# Altium PCB PCB1.PcbDoc (part 1 of 2)
Units mm, origin at the board's own origin, x right, y up, seen from the top; angles counter-clockwise.
Board outline 100.46 x 63.37 mm, 4 copper layers (Top Layer, GND, VCC, Btm lyer), stack 0.603 mm thick; 189 components, 141 nets, 719 pads, 18 vias.
Unrouted connection lines stored in the file: 486.
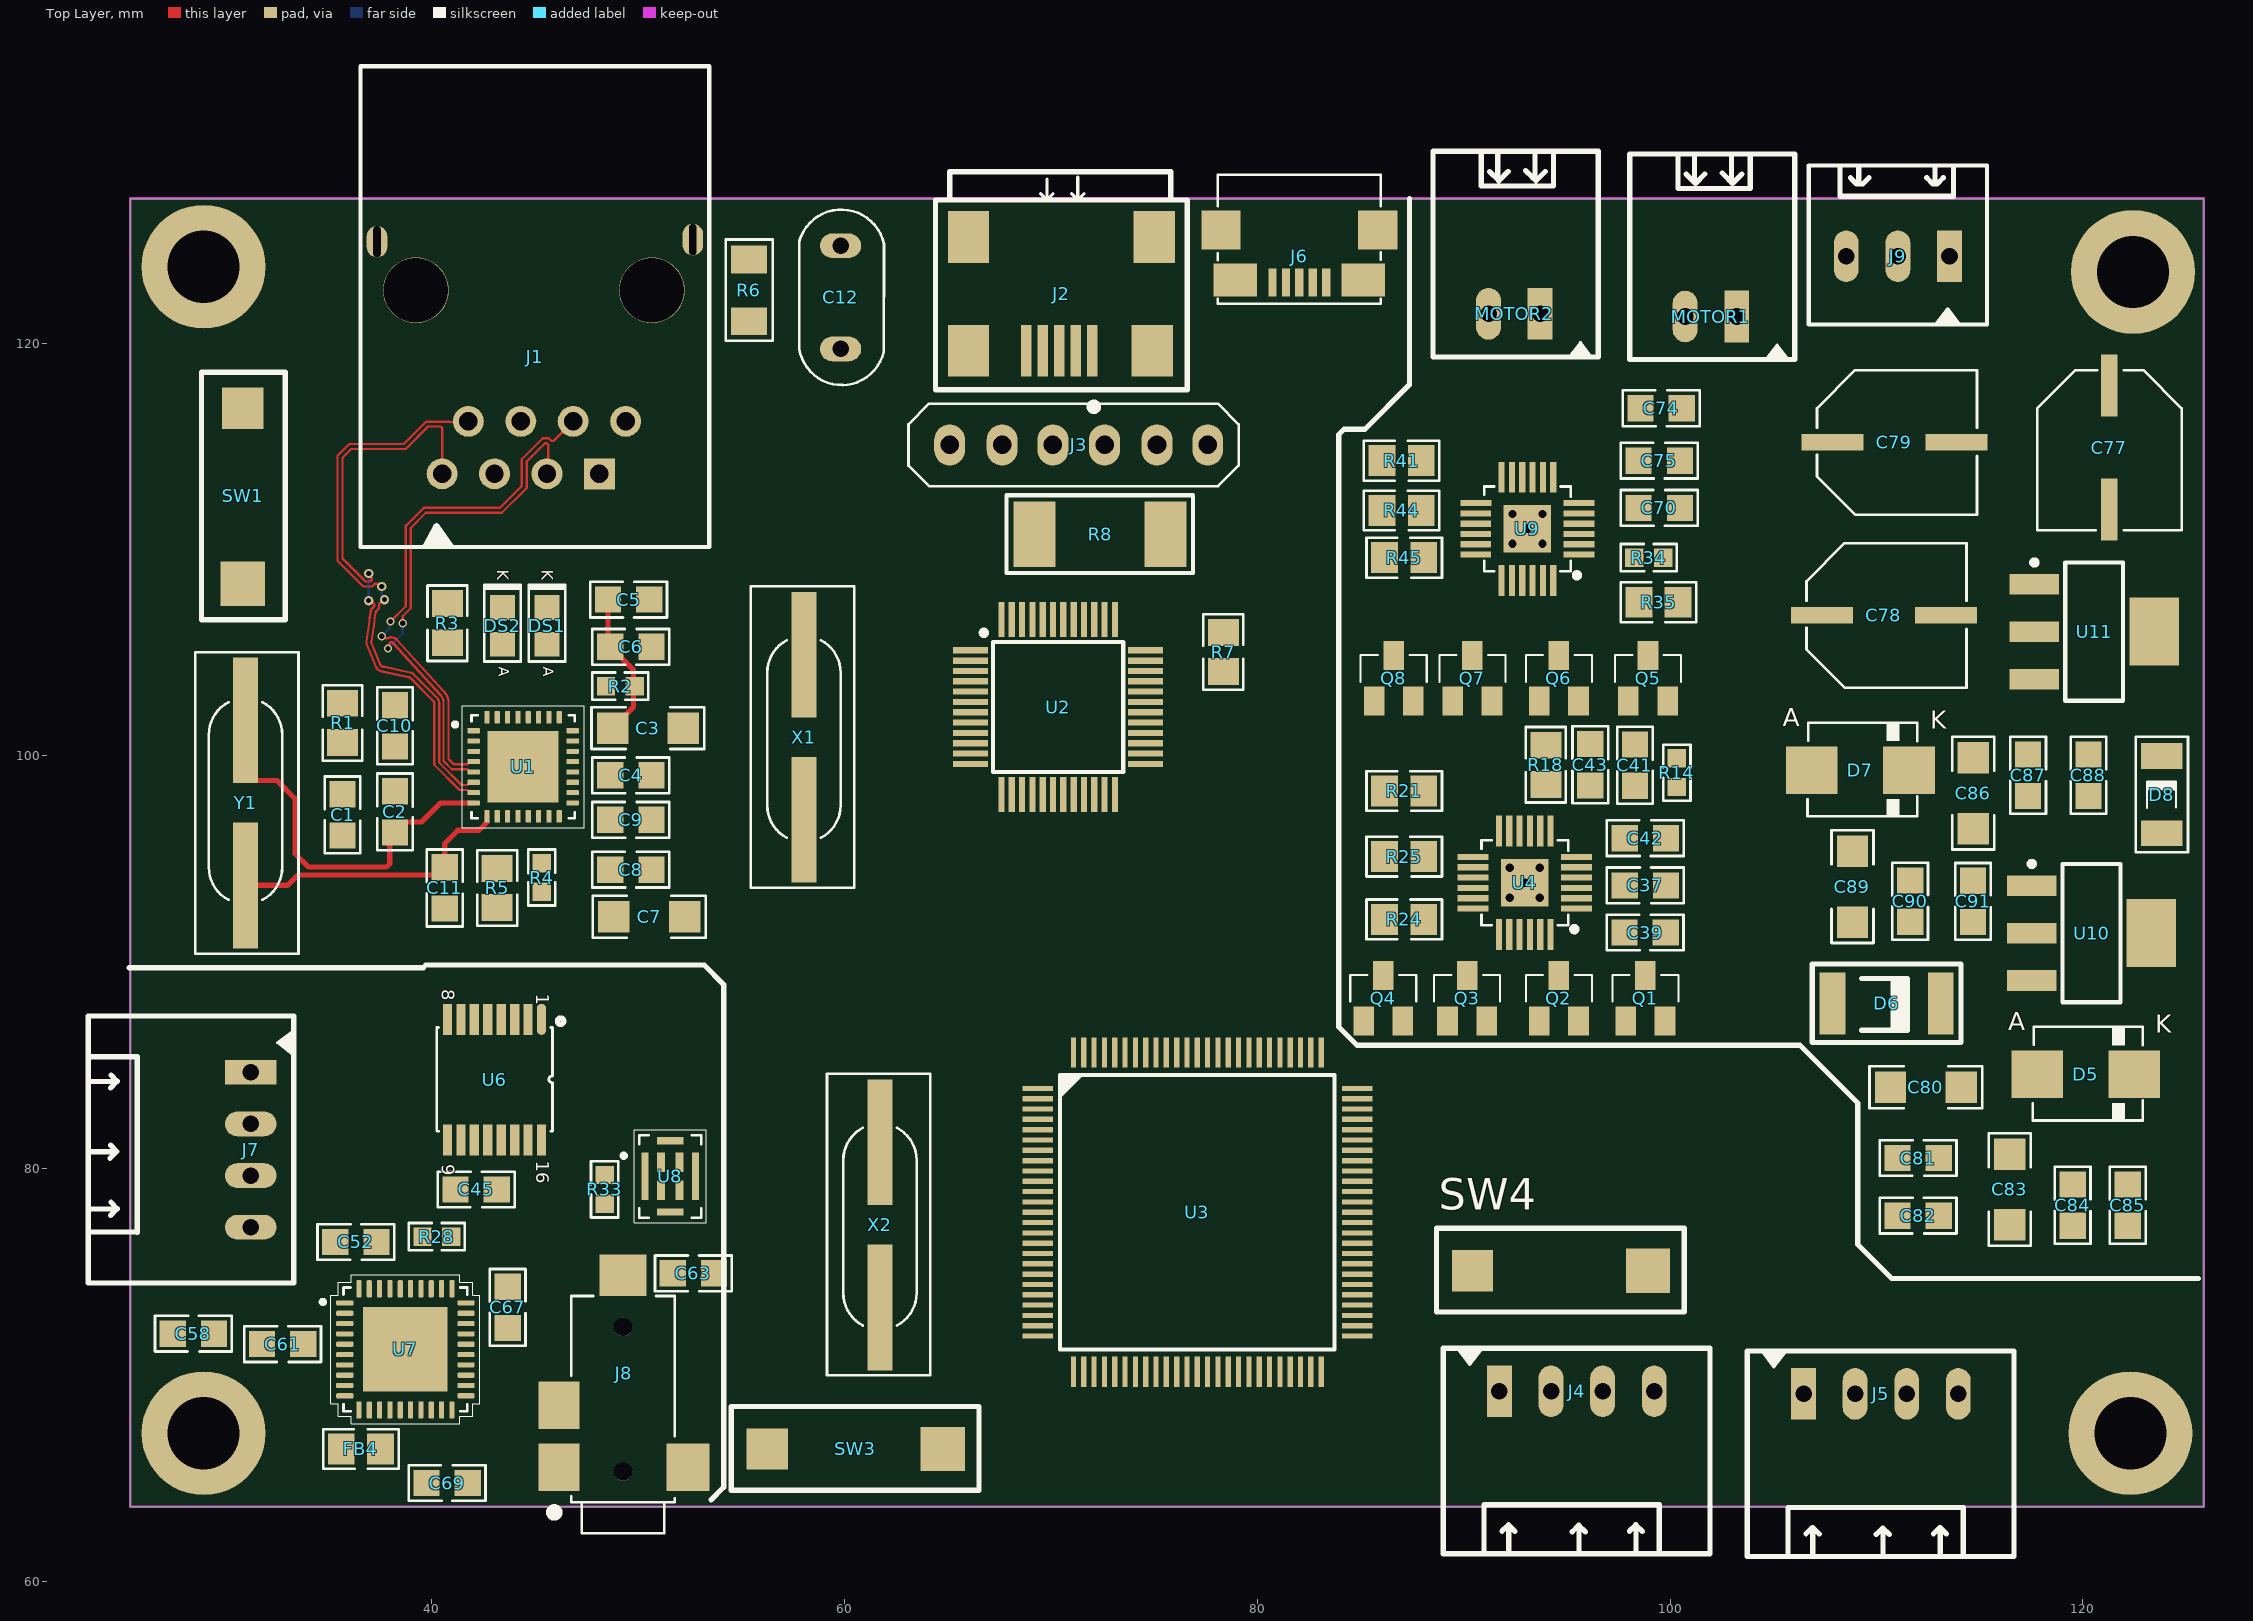
[diagram p0: Top Layer view]
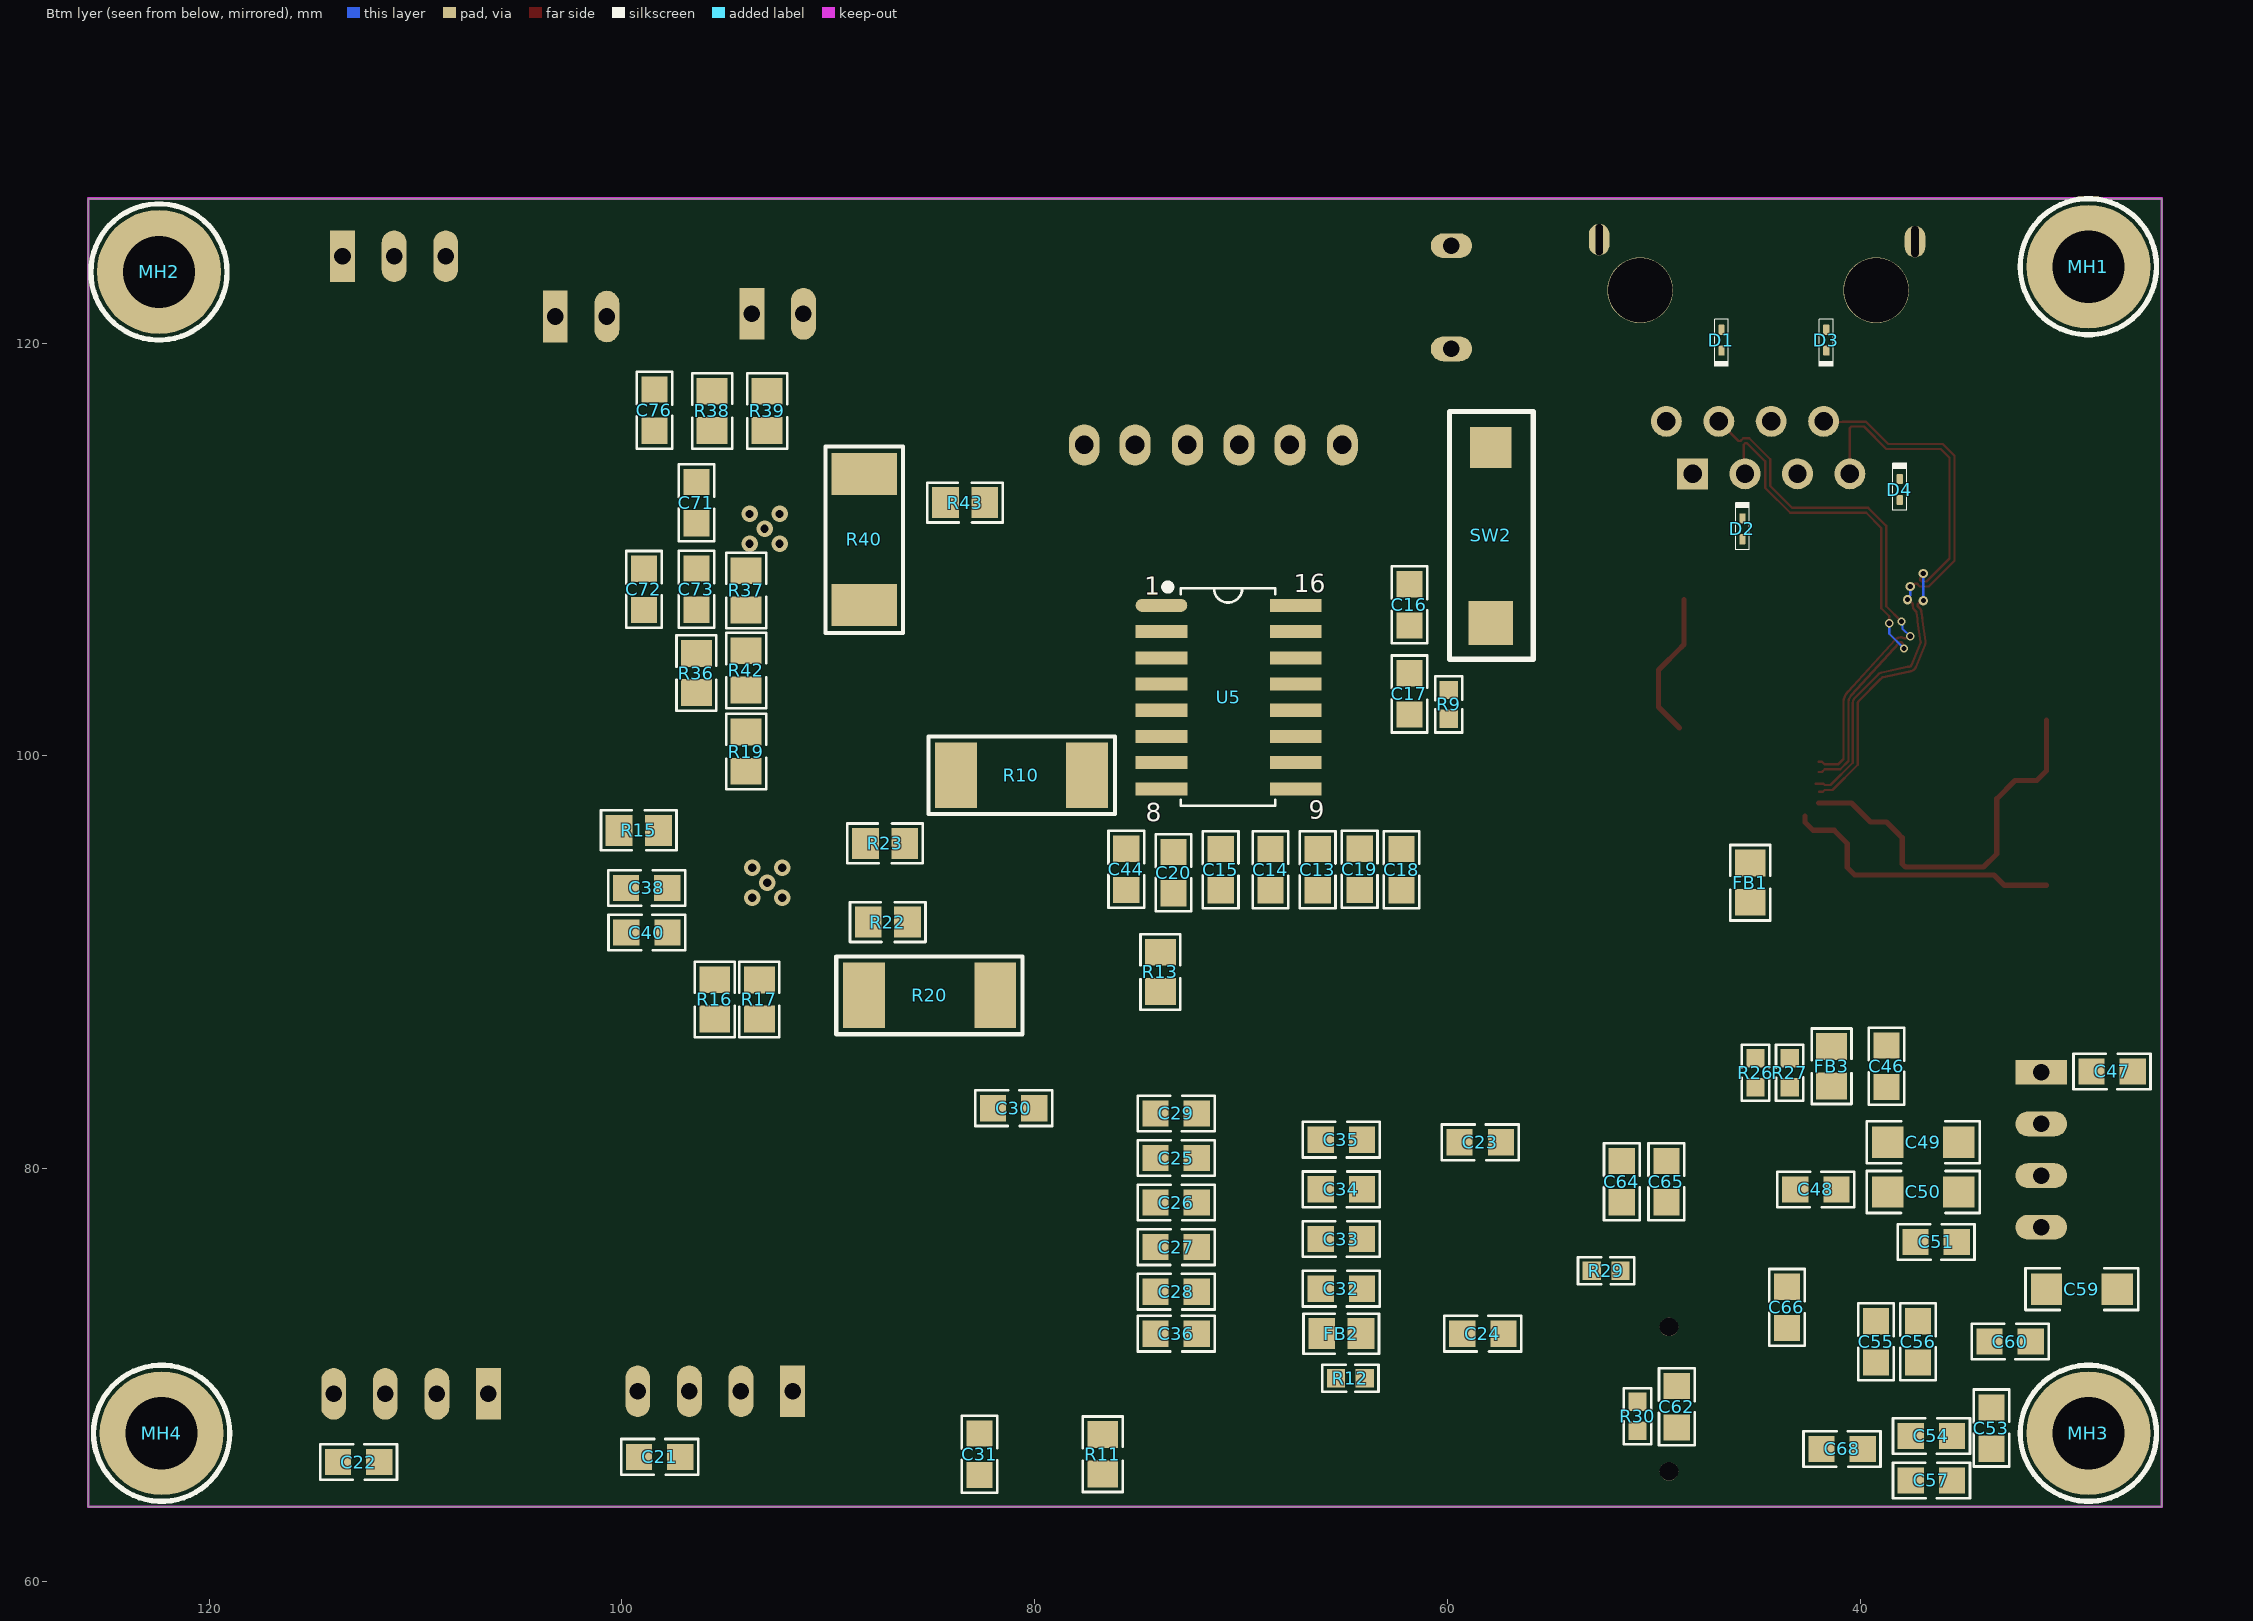
[diagram p1: Btm lyer view, seen from below]

## Layer stack, top to bottom
Top Solder: solder mask 0.0102, Solder Resist, Dk 3.5
Top Layer: signal copper 0.035
Dielectric 2: prepreg 0.0711, PP-006, Dk 4.1
GND: signal copper 0.0356
Dielectric 1: dielectric 0.32, FR-4, Dk 4.8
VCC: signal copper 0.0356
Dielectric 3: prepreg 0.0711, PP-006, Dk 4.1
Btm lyer: signal copper 0.035
Bottom Solder: solder mask 0.0102, Solder Resist, Dk 3.5

## Board outline
25.4,63.627 125.857,63.627 125.857,127 25.4,127

## Design rules (kind name [scope] priority, off if disabled: settings)
Clearance [All] p1: gap=0.1 ignorepadtopadclearanceinfootprint=TRUE
DiffPairsRouting DiffPairsR90 [InDifferentialPairClass('All Differential Pairs')] p1: maxlimit=0.127 minlimit=0.127 mostfreqgap=0.127 toplayer_minwidth=0.111 toplayer_maxwidth=0.111 toplayer_prefwidth=0.111 midlayer1_minwidth=0.057 midlayer1_maxwidth=0.057 midlayer1_prefwidth=0.057 midlayer2_minwidth=0.057 midlayer2_maxwidth=0.057 midlayer2_prefwidth=0.057 bottomlayer_minwidth=0.111 bottomlayer_maxwidth=0.111 bottomlayer_prefwidth=0.111 impedanceprofiledriven=TRUE impedanceprofileid={EB6393CE-8A62-4E29-9BFE-110825FF800A} impedanceprofilevalue=90.000000 maxuncoupledlength=12.7
DiffPairsRouting DiffRoute100 [InDifferentialPairClass('All Differential Pairs')] p2: maxlimit=0.127 minlimit=0.127 mostfreqgap=0.127 toplayer_minwidth=0.086 toplayer_maxwidth=0.086 toplayer_prefwidth=0.086 midlayer1_minwidth=0.038 midlayer1_maxwidth=0.038 midlayer1_prefwidth=0.038 midlayer2_minwidth=0.038 midlayer2_maxwidth=0.038 midlayer2_prefwidth=0.038 bottomlayer_minwidth=0.086 bottomlayer_maxwidth=0.086 bottomlayer_prefwidth=0.086 impedanceprofiledriven=TRUE impedanceprofileid={1F494841-52F5-4D5F-A576-B8F19D2DC5FA} impedanceprofilevalue=100.000000 maxuncoupledlength=12.7
PolygonConnect [All] p1: connectstyle=Relief reliefconductorwidth=0.254 reliefentries=4 polygonreliefangle="90 Angle" airgapwidth=0.254
RoutingVias [All] p1: holewidth=0.711 width=1.27 viastyle="Through Hole" minholewidth=0.711 minwidth=1.27 maxholewidth=0.711 maxwidth=1.27
SolderMaskExpansion [All] p1: expansion=0 istentingtop=FALSE
SupplyNets "Schematic Supply Nets_6" [InNet('3V3')] p1: voltage=0.000
SupplyNets "Schematic Supply Nets_5" [InNet('3.3V')] p2: voltage=0.000
SupplyNets "Schematic Supply Nets_4" [InNet('GND')] p3: voltage=0.000
SupplyNets "Schematic Supply Nets_3" [InNet('VDDIO')] p4: voltage=0.000
SupplyNets "Schematic Supply Nets_2" [InNet('VCC')] p5: voltage=0.000
SupplyNets "Schematic Supply Nets_1" [InNet('ERT')] p6: voltage=0.000
SupplyNets "Schematic Supply Nets" [InNet('1V8')] p7: voltage=0.000
Width [All] p1: maxlimit=0.254 minlimit=0.254 preferedwidth=0.254
29 further rules are at their usual default settings.

## Classes and differential pairs
differential pair class *DIFF100: RD TD
differential pair class *DIFF90: uD usb
net class *50Ohms: INT MDC MDIO RX_CLK RX_D0 RX_D1 RX_D2 RX_D3 RX_DV RX_ER TX_CLK TX_DO TX_EN
component class UART: C44 J6 U5
component class STM32F407: C21 C22 C23 C24 C25 C26 C27 C28 C29 C30 C31 C32 C33 C34 C35 C36 FB2 J4 J5 R11 R12 R13 SW3 U3 X2
component class STM32F103_DEBUG: C13 C14 C15 C16 C17 C18 C19 C20 J2 J3 R7 R8 R9 R10 SW2 U2 X1
component class PowerSupply: C77 C78 C79 C80 C81 C82 C83 C84 C85 C86 C87 C88 C89 C90 C91 D5 D6 D7 D8 J9 MH1 MH2 MH3 MH4 U10 U11
component class MotorDriver: C37 C38 C39 C40 C41 C42 C43 MOTOR1 Q1 Q2 Q3 Q4 R14 R15 R16 R17 R18 R19 R20 R21 R22 R23 R24 R25 U4
component class MotorDriver2: C70 C71 C72 C73 C74 C75 C76 MOTOR2 Q5 Q6 Q7 Q8 R34 R35 R36 R37 R38 R39 R40 R41 R42 R43 R44 R45 U9
component class Ethernet: C1 C2 C3 C4 C5 C6 C7 C8 C9 C10 C11 C12 D1 D2 D3 D4 DS1 DS2 FB1 J1 R1 R2 R3 R4 R5 R6 SW1 U1 Y1
component class DAC: C51 C52 C53 C54 C55 C56 C57 C58 C59 C60 C61 C62 C63 C64 C65 C66 C67 C68 C69 FB4 J8 R28 R29 R30 R33 U7 U8
component class ADC: C45 C46 C47 C48 C49 C50 FB3 J7 R26 R27 SW4 U6
differential pair usb: +usb_p -usb_n
differential pair uD: +uD_P -uD_N
differential pair TD: +TD_P -TD_N
differential pair RD: +RD_P -RD_N

## Components (designator, comment, footprint, x,y, rotation, side; value= is the part's Value field where it differs from the comment)
C1 "10nF" CAP_0805 35.687,97.139 r90 top
C2 "20pF" CAP_0805 38.227,97.282 r270 top
C3 "10uF" CAP_1206 50.483,101.341 r180 top
C4 "1uF" CAP_0805 49.657,99.06 r180 top
C5 "0.1uF" CAP_0805 49.546,107.569 r180 top
C6 "10nF" CAP_0805 49.657,105.283 r180 top
C7 "10uF" CAP_1206 50.546,92.202 r180 top
C8 "1uF" CAP_0805 49.657,94.488 r180 top
C9 "0.1uF" CAP_0805 49.657,96.901 r180 top
C10 "10nF" CAP_0805 38.227,101.457 r270 top
C11 "20pF" CAP_0805 40.64,93.599 r90 top
C12 "10nF" CAP_P196_102X287_H332_RAD_TH 59.817,124.714 r270 top
C13 "0.1uF" CAP_0805 66.294,94.488 r90 bottom
C14 "0.1uF" CAP_0805 68.58,94.488 r90 bottom
C15 "0.1uF" CAP_0805 70.993,94.488 r90 bottom
C16 "30pF" CAP_0805 61.849,107.315 r270 bottom
C17 "30pF" CAP_0805 61.849,102.997 r90 bottom
C18 "1uF" CAP_0805 62.23,94.488 r90 bottom
C19 "10nF" CAP_0805 64.262,94.504 r90 bottom
C20 "0.1uF" CAP_0805 73.279,94.345 r90 bottom
C21 "0.1uF" CAP_0805 98.171,66.04 r180 bottom
C22 "0.1uF" CAP_0805 112.76,65.786 r180 bottom
C23 "18pF" CAP_0805 58.42,81.28 r180 bottom
C24 "18pF" CAP_0805 58.293,72.009 r180 bottom
C25 "0.1uF" CAP_0805 73.152,80.518 r180 bottom
C26 "0.1uF" CAP_0805 73.152,78.359 r180 bottom
C27 "0.1uF" CAP_0805 73.152,76.2 r180 bottom
C28 "0.1uF" CAP_0805 73.152,74.041 r180 bottom
C29 "4.7uF" CAP_0805 73.152,82.677 r0 bottom
C30 "2.2uF" CAP_0805 81.026,82.931 r180 bottom
C31 "2.2uF" CAP_0805 82.677,66.167 r90 bottom
C32 "1uF" CAP_0805 65.151,74.187 r0 bottom
C33 "1uF" CAP_0805 65.151,76.594 r0 bottom
C34 "0.1uF" CAP_0805 65.151,79 r0 bottom
C35 "0.1uF" CAP_0805 65.151,81.407 r0 bottom
C36 "0.1uF" CAP_0805 73.152,72.009 r180 bottom
C37 "0.1uF" CAP_0805 98.806,93.726 r0 top
C38 "1uF" CAP_0805 98.806,93.599 r0 bottom
C39 "0.1uF" CAP_0805 98.79,91.44 r180 top
C40 "100pF" CAP_0805 98.79,91.44 r180 bottom
C41 "1uF" CAP_0805 98.298,99.552 r270 top
C42 "1uF" CAP_0805 98.806,96.012 r180 top
C43 "1uF" CAP_0805 96.139,99.568 r270 top
C44 "0.1uF" CAP_0805 75.565,94.504 r90 bottom
C45 "0.1uF" CAP_0805 42.164,78.994 r0 top
C46 "0.1uF" CAP_0805 38.735,84.963 r270 bottom
C47 "0.1uF" CAP_0805 27.813,84.709 r0 bottom
C48 "0.1uF" CAP_0805 42.164,78.994 r180 bottom
C49 "10uF" CAP_1206 36.957,81.28 r0 bottom
C50 "10uF" CAP_1206 36.957,78.867 r0 bottom
C51 "1uF" CAP_0805 36.338,76.454 r0 bottom
C52 "0.1uF" CAP_0805 36.338,76.454 r0 top
C53 "1uF" CAP_0805 33.655,67.437 r90 bottom
C54 "1uF" CAP_0805 36.56,67.056 r0 bottom
C55 "0.1uF" CAP_0805 39.243,71.612 r270 bottom
C56 "0.1uF" CAP_0805 37.211,71.612 r270 bottom
C57 "1uF" CAP_0805 36.56,64.897 r0 bottom
C58 "0.1uF" CAP_0805 28.464,72.009 r0 top
C59 "10uF" CAP_1206 29.273,74.163 r0 bottom
C60 "0.1uF" CAP_0805 32.75,71.628 r0 bottom
C61 "0.1uF" CAP_0805 32.782,71.501 r0 top
C62 "22nF" CAP_0805 48.895,68.469 r270 bottom
C63 "22nF" CAP_0805 52.689,74.93 r0 top
C64 "1uF" CAP_0805 51.562,79.375 r90 bottom
C65 "0.1uF" CAP_0805 49.403,79.375 r90 bottom
C66 "150pF" CAP_0805 43.561,73.279 r90 bottom
C67 "150pF" CAP_0805 43.688,73.279 r90 top
C68 "150pF" CAP_0805 40.894,66.421 r180 bottom
C69 "150pF" CAP_0805 40.751,64.77 r180 top
C70 "0.1uF" CAP_0805 99.476,112.014 r180 top
C71 "1uF" CAP_0805 96.393,112.268 r90 bottom
C72 "0.1uF" CAP_0805 98.933,108.061 r90 bottom
C73 "100pF" CAP_0805 96.393,108.077 r90 bottom
C74 "1uF" CAP_0805 99.568,116.84 r180 top
C75 "1uF" CAP_0805 99.476,114.3 r180 top
C76 "1uF" CAP_0805 98.425,116.748 r270 bottom
C77 "100uF" ACAP_P236_D305_H303_RAD 121.285,114.935 r270 top
C78 "100uF" ACAP_P236_D305_H303_RAD 110.363,106.807 r0 top
C79 "100uF" ACAP_P236_D305_H303_RAD 110.871,115.189 r0 top
C80 "10uF" CAP_1206 112.395,83.947 r0 top
C81 "0.1uF" CAP_0805 112.014,80.518 r0 top
C82 "1uF" CAP_0805 112.014,77.724 r0 top
C83 "10uF" CAP_1206 116.459,78.994 r90 top
C84 "0.1uF" CAP_0805 119.507,78.232 r90 top
C85 "1uF" CAP_0805 122.174,78.232 r90 top
C86 "10uF" CAP_1206 114.681,98.193 r90 top
C87 "0.1uF" CAP_0805 117.348,99.06 r90 top
C88 "1uF" CAP_0805 120.269,99.06 r90 top
C89 "10uF" CAP_1206 108.834,93.662 r90 top
C90 "0.1uF" CAP_0805 111.633,92.964 r90 top
C91 "1uF" CAP_0805 114.681,92.948 r90 top
D1 "ESD3V3D9-TP" DIO_SOD-923 46.736,120.139 r90 bottom
D2 "ESD3V3D9-TP" DIO_SOD-923 45.72,110.998 r270 bottom
D3 "ESD3V3D9-TP" DIO_SOD-923 41.656,120.139 r90 bottom
D4 "ESD3V3D9-TP" DIO_SOD-923 38.1,112.903 r270 bottom
D5 "MBRS130LT3G" DIO_SMB_DO-214AA 120.142,84.582 r0 top
D6 "1.8V Zener" DIO_DO-213AB_SMD 110.49,88.011 r180 top
D7 "MBRS130LT3G" DIO_SMB_DO-214AA 109.22,99.314 r0 top
D8 "3.3V ZENER" DIO_SOD80C 123.825,98.124 r270 top
DS1 "GREEN LED" LED_0805 45.593,106.299 r270 top
DS2 "GREEN LED" LED_0805 43.434,106.299 r270 top
FB1 "1K" IND_0805 45.339,93.855 r90 bottom
FB2 "1K" IND_0805 65.151,72.009 r0 bottom
FB3 "1K" IND_0805 41.402,84.963 r270 bottom
FB4 "1K" IND_0805 36.576,66.421 r0 top
J1 "RJ45 LAN" CON10_P106_RJ45_TH_ST 50.658,122.61 r180 top
J2 "USB2.0 MINI B" CON_690-005-299-043 66.009,119.634 r270 top
J3 "Bergstrip 2.54mm" CON6_100_59D78_TH_ST 65.104,115.062 r0 top
J4 "S4B-XH-A-1(LF)(SN)" CON4_100_S4B-XH-A_TH_RA 95.484,69.215 r90 top
J5 "S4B-XH-A-1(LF)(SN)" CON4_100_S4B-XH-A_TH_RA 110.216,69.088 r90 top locked
J6 "USB MICRO-B" CON_10118192-0001LF_SMD 82.042,124.206 r180 top
J7 "S4B-XH-A-1(LF)(SN)" CON4_100_S4B-XH-A_TH_RA 31.242,80.919 r0 top
J8 "4X1 STEREO" CON_SJ-2504A-SMT-TR_SMD 49.276,68.834 r90 top
J9 "Terminal Block 2.5mm" CON3_100_TB_TH_ST 111.038,124.206 r270 top
MH1 "Mounting Hole" MOUNTING 28.956,123.698 r180 bottom
MH2 "Mounting Hole" MOUNTING 122.428,123.444 r180 bottom
MH3 "Mounting Hole" MOUNTING 28.956,67.183 r180 bottom
MH4 "Mounting Hole" MOUNTING 122.301,67.183 r180 bottom
MOTOR1 "S2B-XH-A(LF)(SN)" CON2_100_S2B-XH-A_TH_RA 101.981,121.285 r270 top
MOTOR2 "S2B-XH-A(LF)(SN)" CON2_100_S2B-XH-A_TH_RA 92.456,121.412 r270 top
Q1 "AO3404A" "SOT 23-3" 98.806,88.265 r270 top
Q2 "AO3404A" "SOT 23-3" 94.615,88.265 r270 top
Q3 "AO3404A" "SOT 23-3" 90.17,88.265 r270 top
Q4 "AO3404A" "SOT 23-3" 86.106,88.265 r270 top
Q5 "AO3404A" "SOT 23-3" 98.933,103.759 r270 top
Q6 "AO3404A" "SOT 23-3" 94.615,103.759 r270 top
Q7 "AO3404A" "SOT 23-3" 90.424,103.759 r270 top
Q8 "AO3404A" "SOT 23-3" 86.614,103.759 r270 top
R1 "10K" RES_0805 35.687,101.6 r270 top
R2 "10K" RES_0603 49.149,103.378 r180 top
R3 "10K" RES_0805 40.767,106.426 r270 top
R4 "10K" RES_0603 45.339,94.107 r270 top
R5 "6.49K" RES_0805 43.18,93.599 r270 top
R6 "1M" RES_1206 55.372,122.555 r90 top
R7 "2.7K" RES_0805 78.359,105.029 r270 top
R8 "100KOHM" RES_2512 72.39,110.744 r0 top
R9 "10K" RES_0603 59.944,102.489 r270 bottom
R10 "100KOHM" RES_2512 80.645,99.06 r0 bottom
R11 "100K" RES_0805 76.708,66.167 r270 bottom
R12 "10K" RES_0603 64.707,69.85 r180 bottom
R13 "100K" RES_0805 73.914,89.535 r90 bottom
R14 "2.2R" RES_0603 100.33,99.187 r90 top
R15 "3.3K" RES_0805 99.187,96.393 r0 bottom
R16 "10K" RES_0805 95.504,88.204 r90 bottom
R17 "10K" RES_0805 93.345,88.199 r90 bottom
R18 "10K" RES_0805 93.98,99.568 r90 top
R19 "10K" RES_0805 93.98,100.203 r90 bottom
R20 "50mOHM" RES_2512 85.09,88.392 r180 bottom
R21 "33K" RES_0805 87.122,98.298 r180 top
R22 "10K" RES_0805 87.122,91.948 r180 bottom
R23 "10K" RES_0805 87.249,95.758 r180 bottom
R24 "10K" RES_0805 87.122,92.075 r180 top
R25 "10K" RES_0805 87.122,95.123 r180 top
R26 "10K" RES_0603 45.085,84.645 r90 bottom
R27 "10K" RES_0603 43.434,84.645 r90 bottom
R28 "10K" RES_0603 40.259,76.708 r0 top
R29 "51.1R" RES_0603 52.324,75.057 r0 bottom
R30 "51.1R" RES_0603 50.8,68.008 r90 bottom
R33 "10K" RES_0603 48.387,78.994 r90 top
R34 "2.2R" RES_0603 98.971,109.601 r0 top
R35 "3.3K" RES_0805 99.441,107.442 r0 top
R36 "10K" RES_0805 96.393,104.013 r270 bottom
R37 "10K" RES_0805 93.98,108.016 r90 bottom
R38 "10K" RES_0805 95.631,116.713 r270 bottom
R39 "10K" RES_0805 92.964,116.713 r90 bottom
R40 "50mOHM" RES_2512 88.265,110.49 r90 bottom
R41 "33K" RES_0805 86.995,114.3 r180 top
R42 "10K" RES_0805 93.98,104.14 r270 bottom
R43 "10K" RES_0805 83.373,112.268 r180 bottom
R44 "10K" RES_0805 86.995,111.887 r180 top
R45 "10K" RES_0805 87.122,109.601 r180 top
SW1 "TACTILE SWITCH" SW_342_SMD 30.861,116.84 r90 top
SW2 "TACTILE SWITCH" SW_342_SMD 57.912,114.935 r90 bottom
SW3 "TACTILE SWITCH" SW_342_SMD 56.27,66.421 r180 top
SW4 "TACTILE SWITCH" SW_342_SMD 90.433,75.057 r180 top
U1 "DP83826IRHBR" VQFN32_19_218_23X9_SMD 44.437,99.469 r0 top
U2 "STM32F103C8T6" LQFP-48_19.6_393_58X11_SMD 70.358,102.362 r0 top
U3 "STM32F407VGT6" QFN100_19.6_669_58X10_SMD 77.098,77.764 r0 top locked
U4 "DRV8701ERGET" VFQFN24_19.6_196_12X32_SMD_1 94.214,95.853 r180 top
U5 "CH340C" SOIC16_50_284_25X90_SMT 70.612,102.87 r180 bottom
U6 "ADS122C04IPW" TSSOP16_25-59_294_54X14_SMT 43.053,84.328 r270 top
U7 "CS43L22-CNZ" QFN40_19_284_33X9_SMD 38.735,71.247 r0 top locked
U8 "IMP34DT05TR" HCLGA-4_53_137_15X37_SMD 51.562,79.629 r0 top
U9 "DRV8701ERGET" VFQFN24_19.6_196_12X32_SMD_1 94.341,112.998 r180 top
U10 "LD1117S18TR" SOT223_3 120.396,91.44 r0 top
U11 "LD1117S33CTR" SOT223_3 120.523,106.045 r0 top
X1 "8Mhz" XTAL_314_240X47_SMD 58.039,96.901 r90 top
X2 "8Mhz" XTAL_314_240X47_SMD 61.722,73.279 r90 top
Y1 "25Mhz -14mm" XTAL_314_240X47_SMD 30.988,101.726 r270 top

## Footprints (in the part's own frame and the unit in brackets; to place one, negate y for a bottom-side part, rotate by r counter-clockwise, add the part's x,y. Pads: shape width x height; smd on the part's side, far side on the other; paste and mask are expansions set on the pad)
ACAP_P236_D305_H303_RAD [mm] "Aluminium Capacitor"
  rect 3x0.8 smd mask+0.076: 1(-3,0) 2(3,0)
  silkscreen extent -3.75,-3.5 4,3.5, body extent -3.5,-3.3 3.5,3.3, height 8.11
CAP_0805 [mm] "Ceramic Capacitor"
  rect 1.27x1.27 smd mask+0.076: 1(-1,0) 2(1,0)
  silkscreen extent -1.86,-0.86 1.86,0.86, body extent -1,-0.62 1,0.63, height 0.78
CAP_1206 [mil] "Ceramic Capacitor"
  rect 60x60 smd: 1(-67.49,-0.2) 2(67.51,-0.2)
  silkscreen extent -107,-40 108,40, body extent -63,-31 63,32, height 39
CAP_P196_102X287_H332_RAD_TH [mm] "Y1 CAP, TROUGH HOLE"
  oval 1.2x2 hole 0.8 mask+0.076: 1(0,0) 2(5,0)
  silkscreen extent -1.75,-2 6.75,2.1, body extent -1.04,-1.3 6.04,1.3, height 9.14
CON2_100_S2B-XH-A_TH_RA [mm] "Connector Header"
  rect 2.5x1.2 hole 0.8: 1(0,1.25)
  oval 2.5x1.2 hole 0.8: 2(0,-1.25)
  silkscreen extent -7.87,-3.94 2.08,4.06, body extent -8.57,-3.65 0.34,3.85, height 5.91
CON3_100_TB_TH_ST [mm]
  rect 2.5x1.2 hole 0.8: 1(0,2.5)
  oval 2.5x1.2 hole 0.8: 2(0,0) 3(0,-2.5)
  silkscreen extent -4.4,-4.32 3.3,4.32, body extent -2.5,-4.07 3.1,4.07, height 12.86
CON4_100_S4B-XH-A_TH_RA [mm] "Connector Header"
  rect 2.5x1.2 hole 0.8: 1(0,3.75)
  oval 2.5x1.2 hole 0.8: 2(0,1.25) 3(0,-1.25) 4(0,-3.75)
  silkscreen extent -7.87,-6.45 2.08,6.48, body extent -9.64,-6.25 0.44,6.31, height 5.91
CON6_100_59D78_TH_ST [mm] "Bergstrip"
  oval 1.5x2 hole 0.9: 1(0,0) 2(2.54,0) 3(5,0) 4(7.5,0) 5(10.04,0) 6(12.5,0)
  silkscreen extent -2,-2 14,2, body extent -1.35,-1.24 13.89,1.3, height 8.55
CON10_P106_RJ45_TH_ST [mm] "LAN Connector"
  round 1.5 hole 0.89 paste-2539.97 mask+0: 1(10.145,8.945) 2(8.875,6.405) 3(7.605,8.945) 4(6.335,6.405) 5(5.065,8.945) 6(3.795,6.405) 8(1.255,6.405)
  rect 1.5x1.5 hole 0.89 paste-2539.97 mask+0: 7(2.525,8.945)
  oval 1x1.524 hole 1.5 slot 0.35 at 0 deg: 9(13.3,-2.3) 10(-2,-2.4)
  round 3.18 hole 3.12 unplated paste-2539.97 mask+0: ""(-0.015,0.055) ""(11.415,0.055)
  silkscreen extent -2.79,-10.8 14.1,12.5, body extent -2.53,-3.5 13.73,12.25, height 13.04
CON_690-005-299-043 [mm] "USB MINI-B"
  rect 2.5x0.5 smd: 1(0,6) 2(0,5.2) 3(0,4.4) 4(0,3.6) 5(0,2.8)
  rect 2.5x2 smd: 6(-5.5,9) 6(-5.5,0) 6(0,8.9) 6(0,0)
  silkscreen extent -8.66,-1.6 2.88,10.6, body extent -8.4,-0.55 0.6,9.35, height 3.96
CON_10118192-0001LF_SMD [mm] "USB2.0 MICRO"
  rect 0.4x1.35 smd: 1(-1.3,1.275) 2(-0.65,1.275) 3(0,1.275) 4(0.65,1.275) 5(1.3,1.275)
  rect 2.1x1.6 smd: 6(-3.1,1.15) 7(3.1,1.15)
  rect 1.9x1.9 smd: 8(-3.8,-1.275) 9(3.8,-1.275)
  silkscreen extent -3.95,-3.94 3.95,2.3, body extent -4.04,-3.94 4.04,1.66, height 2.81
CON_SJ-2504A-SMT-TR_SMD [mm]
  rect 2.3x2 smd: 1(-3.3,3.1) 3(-0.3,3.1)
  rect 2x2.3 smd: 2(6,0)
  rect 2.3x2.1 smd: 4(-3.3,-3.15)
  round 0.9 hole 0.9 unplated: ""(-3.5,0) ""(3.5,0)
  silkscreen extent -6.5,-2.5 5,3.53, body extent -6.5,-4 6.5,4, height 4.01
DIO_DO-213AB_SMD [mm] "Diode"
  rect 1.25x3 smd: A(2.625,0) K(-2.625,0)
  silkscreen extent -3.61,-1.9 3.6,1.9, body extent -2.49,-1.25 2.51,1.25, height 2.75
DIO_SMB_DO-214AA [mm] "Diode"
  rect 2.5x2.3 smd: A(-2.35,0) K(2.354,0)
  silkscreen extent -2.56,-2.25 2.75,2.29, body extent -2.56,-1.84 2.84,1.76, height 2.27
DIO_SOD80C [mm] "Voltage regulator diodes"
  rect 1.25x2 smd: A(1.875,0) K(-1.875,0)
  silkscreen extent -2.8,-1.27 2.79,1.27, body extent -1.82,-0.78 1.77,0.72, height 1.5
DIO_SOD-923 [mm]
  rrect25% 0.49x0.3 smd: A(0.505,0) K(-0.505,0)
  silkscreen extent -1.27,-0.33 1.02,0.33
HCLGA-4_53_137_15X37_SMD [mm]
  rect 0.4x0.95 smd: 1(-0.45,0.675) 2(-0.45,-0.675) 3(0.45,-0.675) 4(0.45,0.675)
  rect 0.35x2.3 smd: 5(-1.225,0) 5(1.225,0)
  rect 1.3x0.35 smd: 5(0,-1.725) 5(0,1.725)
  silkscreen extent -2.35,-2.25 1.75,2.25, body extent -1.5,-2 1.5,2, height 1.02
IND_0805 [mm] "Ferrite Bead"
  rect 1.3x1.5 smd mask+0.076: 1(0.95,0) 2(-0.95,0)
  silkscreen extent -1.83,-0.97 1.83,0.97, body extent -1,-0.63 1,0.62, height 0.5
LED_0805 [mm] "LED"
  rect 1.2x1.2 smd mask+0.076: A(0.889,0) K(-0.889,0)
  silkscreen extent -1.99,-0.89 1.73,0.89, body extent -1.01,-0.62 1.01,0.63, height 1.1
LQFP-48_19.6_393_58X11_SMD [mm] "48LQFP"
  rect 1.7x0.3 smd mask+0.076: 1(-4.238,2.75) 2(-4.238,2.25) 3(-4.238,1.75) 4(-4.238,1.25) 5(-4.238,0.75) 6(-4.238,0.25) 7(-4.238,-0.25) 8(-4.238,-0.75) 9(-4.238,-1.25) 10(-4.238,-1.75) 11(-4.238,-2.25) 12(-4.238,-2.75) 25(4.238,-2.75) 26(4.238,-2.25) 27(4.238,-1.75) 28(4.238,-1.25) 29(4.238,-0.75) 30(4.238,-0.25) 31(4.238,0.25) 32(4.238,0.75) 33(4.238,1.25) 34(4.238,1.75) 35(4.238,2.25) 36(4.238,2.75)
  rect 0.3x1.7 smd mask+0.076: 13(-2.75,-4.238) 14(-2.25,-4.238) 15(-1.75,-4.238) 16(-1.25,-4.238) 17(-0.75,-4.238) 18(-0.25,-4.238) 19(0.25,-4.238) 20(0.75,-4.238) 21(1.25,-4.238) 22(1.75,-4.238) 23(2.25,-4.238) 24(2.75,-4.238) 37(2.75,4.238) 38(2.25,4.238) 39(1.75,4.238) 40(1.25,4.238) 41(0.75,4.238) 42(0.25,4.238) 43(-0.25,4.238) 44(-0.75,4.238) 45(-1.25,4.238) 46(-1.75,4.238) 47(-2.25,4.238) 48(-2.75,4.238)
  silkscreen extent -3.72,-3.15 3.15,3.72, body extent -4.5,-4.5 4.5,4.5, height 1.7
MOUNTING [mm] "MH"
  round 6 hole 3.5: 1(0,0)
  silkscreen extent -3.3,-3.3 3.3,3.3, body extent -3,-2.75 3,2.75, height 4.24
QFN40_19_284_33X9_SMD [mm]
  rrect48% 0.84x0.25 smd: 1(-2.935,2.25) 2(-2.935,1.75) 3(-2.935,1.25) 4(-2.935,0.75) 5(-2.935,0.25) 6(-2.935,-0.25) 7(-2.935,-0.75) 8(-2.935,-1.25) 9(-2.935,-1.75) 10(-2.935,-2.25) 21(2.935,-2.25) 22(2.935,-1.75) 23(2.935,-1.25) 24(2.935,-0.75) 25(2.935,-0.25) 26(2.935,0.25) 27(2.935,0.75) 28(2.935,1.25) 29(2.935,1.75) 30(2.935,2.25)
  rrect48% 0.25x0.84 smd: 11(-2.25,-2.935) 12(-1.75,-2.935) 13(-1.25,-2.935) 14(-0.75,-2.935) 15(-0.25,-2.935) 16(0.25,-2.935) 17(0.75,-2.935) 18(1.25,-2.935) 19(1.75,-2.935) 20(2.25,-2.935) 31(2.25,2.935) 32(1.75,2.935) 33(1.25,2.935) 34(0.75,2.935) 35(0.25,2.935) 36(-0.25,2.935) 37(-0.75,2.935) 38(-1.25,2.935) 39(-1.75,2.935) 40(-2.25,2.935)
  rect 4.1x4.1 smd paste-3: 41(0,0)
  silkscreen extent -4.1,-3.61 3.61,3.61, body extent -3.07,-3 3.07,3.15, height 1.06
QFN100_19.6_669_58X10_SMD [mm] "CASE: QFN"
  rect 1.475x0.254 smd mask+0.076: 1(-7.738,6.127) 2(-7.738,5.627) 3(-7.738,5.127) 4(-7.738,4.627) 5(-7.738,4.127) 6(-7.738,3.627) 7(-7.738,3.127) 8(-7.738,2.627) 9(-7.738,2.127) 10(-7.738,1.627) 11(-7.738,1.127) 12(-7.738,0.627) 13(-7.738,0.127) 14(-7.738,-0.373) 15(-7.738,-0.873) 16(-7.738,-1.373) 17(-7.738,-1.873) 18(-7.738,-2.373) 19(-7.738,-2.873) 20(-7.738,-3.373) 21(-7.738,-3.873) 22(-7.738,-4.373) 23(-7.738,-4.873) 24(-7.738,-5.373) 25(-7.738,-5.873) 51(7.738,-5.873) 52(7.738,-5.373) 53(7.738,-4.873) 54(7.738,-4.373) 55(7.738,-3.873) 56(7.738,-3.373) 57(7.738,-2.873) 58(7.738,-2.373) 59(7.738,-1.873) 60(7.738,-1.373) 61(7.738,-0.873) 62(7.738,-0.373) 63(7.738,0.127) 64(7.738,0.627) 65(7.738,1.127) 66(7.738,1.627) 67(7.738,2.127) 68(7.738,2.627) 69(7.738,3.127) 70(7.738,3.627) 71(7.738,4.127) 72(7.738,4.627) 73(7.738,5.127) 74(7.738,5.627) 75(7.738,6.127)
  rect 0.254x1.475 smd mask+0.076: 26(-6,-7.611) 27(-5.5,-7.611) 28(-5,-7.611) 29(-4.5,-7.611) 30(-4,-7.611) 31(-3.5,-7.611) 32(-3,-7.611) 33(-2.5,-7.611) 34(-2,-7.611) 35(-1.5,-7.611) 36(-1,-7.611) 37(-0.5,-7.611) 38(0,-7.611) 39(0.5,-7.611) 40(1,-7.611) 41(1.5,-7.611) 42(2,-7.611) 43(2.5,-7.611) 44(3,-7.611) 45(3.5,-7.611) 46(4,-7.611) 47(4.5,-7.611) 48(5,-7.611) 49(5.5,-7.611) 50(6,-7.611) 76(6,7.865) 77(5.5,7.865) 78(5,7.865) 79(4.5,7.865) 80(4,7.865) 81(3.5,7.865) 82(3,7.865) 83(2.5,7.865) 84(2,7.865) 85(1.5,7.865) 86(1,7.865) 87(0.5,7.865) 88(0,7.865) 89(-0.5,7.865) 90(-1,7.865) 91(-1.5,7.865) 92(-2,7.865) 93(-2.5,7.865) 94(-3,7.865) 95(-3.5,7.865) 96(-4,7.865) 97(-4.5,7.865) 98(-5,7.865) 99(-5.5,7.865) 100(-6,7.865)
  silkscreen extent -6.65,-6.52 6.65,6.78, body extent -8,-8 8,8.13, height 1.6
RES_0603 [mil] "CASE: 0603"
  rect 35x35 smd mask+3: 1(-27.5,0) 2(27.5,0)
  silkscreen extent -53,-26 54,26, body extent -31,-16 31,16, height 18
RES_0805 [mm] "Resister"
  rect 1.3x1.5 smd mask+0.076: 1(0.95,0) 2(-0.95,0)
  silkscreen extent -1.83,-0.97 1.83,0.97, body extent -1,-0.63 1,0.62, height 0.5
RES_1206 [mm] "CASE: 1206"
  rect 1.35x1.75 smd: 1(1.5,0) 2(-1.5,0)
  silkscreen extent -2.44,-1.15 2.46,1.11, body extent -1.55,-0.77 1.55,0.78, height 0.55
RES_2512 [mil] "CASE: 2512"
  rect 80x125 smd: 1(-125,0) 2(125,0)
  silkscreen extent -178,-74 177,74, body extent -139,-60 136,61, height 19
SOIC16_50_284_25X90_SMT [mm]
  oval 2.5x0.635 smd mask+0.076: 1(-3.25,4.42)
  rect 2.5x0.635 smd mask+0.076: 2(-3.25,3.15) 3(-3.25,1.88) 4(-3.25,0.61) 5(-3.25,-0.66) 6(-3.25,-1.93) 7(-3.25,-3.2) 8(-3.25,-4.47) 9(3.25,-4.47) 10(3.25,-3.2) 11(3.25,-1.93) 12(3.25,-0.66) 13(3.25,0.61) 14(3.25,1.88) 15(3.25,3.15) 16(3.25,4.42)
  silkscreen extent -3.07,-5.3 2.26,5.44, body extent -3.02,-4.97 2.98,4.93, height 1.4
SOT223_3 [mm] "CASE: SOT223"
  rect 2.4x1 smd: 1(-2.875,2.275) 2(-2.875,-0.025) 3(-2.875,-2.325)
  rect 2.4x3.3 smd: 4(2.925,-0.025)
  silkscreen extent -3,-3.38 1.43,3.45, body extent -3.73,-3.28 3.27,3.22, height 1.7
"SOT 23-3" [mm] "Case: SOT23"
  rect 1.4x1 smd paste+0 mask+0.076: 1(1.1,-0.95) 2(1.1,0.95) 3(-1.1,0)
  silkscreen extent -1.12,-1.6 0.18,1.6, body extent -1.5,-1.5 1.5,1.5, height 1.3
SW_342_SMD [mm] "CASE: SMD"
  rect 2x2 smd: 1(0,0)
  rect 2.15x2.15 smd: 2(-8.5,0)
  silkscreen extent -10.25,-2.06 1.75,2, body extent -7.17,-1.79 -1.17,1.71, height 2.4
TSSOP16_25-59_294_54X14_SMT [mm] "TSOP, 16-Leads, Body 5.00x4.40mm, Pitch 0.65mm"
  oval 1.5x0.45 smd mask+0.076: 1(-2.908,2.273)
  rect 1.5x0.45 smd mask+0.076: 2(-2.908,1.623) 3(-2.908,0.973) 4(-2.908,0.323) 5(-2.908,-0.327) 6(-2.908,-0.977) 7(-2.908,-1.627) 8(-2.908,-2.277) 9(2.942,-2.277) 10(2.942,-1.627) 11(2.942,-0.977) 12(2.942,-0.327) 13(2.942,0.323) 14(2.942,0.973) 15(2.942,1.623) 16(2.942,2.273)
  silkscreen extent -2.97,-2.81 2.51,3.35, body extent -3.2,-2.55 3.2,2.55, height 1.2
VFQFN24_19.6_196_12X32_SMD_1 [mm] "CASE: VQFN24"
  rect 1.5x0.3 smd mask+0.076: 1(-1.25,3.25) 2(-1.25,2.75) 3(-1.25,2.25) 4(-1.25,1.75) 5(-1.25,1.25) 6(-1.25,0.75) 13(3.75,0.75) 14(3.754,1.25) 15(3.754,1.75) 16(3.754,2.25) 17(3.754,2.75) 18(3.754,3.25)
  rect 0.3x1.5 smd mask+0.076: 7(0,-0.5) 8(0.5,-0.5) 9(1,-0.5) 10(1.5,-0.5) 11(2,-0.5) 12(2.5,-0.5) 19(2.5,4.5) 20(2,4.5) 21(1.5,4.5) 22(1,4.5) 23(0.5,4.5) 24(0,4.5)
  rect 2.3x2.3 smd mask+0.076: 25(1.25,2)
  silkscreen extent -1.27,-0.05 3.35,4.37, body extent -0.8,-0.05 3.3,4.05, height 1
VQFN32_19_218_23X9_SMD [mm]
  rrect25% 0.6x0.25 smd mask+0: 1(-2.4,1.75) 2(-2.4,1.25) 3(-2.4,0.75) 4(-2.4,0.25) 5(-2.4,-0.25) 6(-2.4,-0.75) 7(-2.4,-1.25) 8(-2.4,-1.75) 17(2.4,-1.75) 18(2.4,-1.25) 19(2.4,-0.75) 20(2.4,-0.25) 21(2.4,0.25) 22(2.4,0.75) 23(2.4,1.25) 24(2.4,1.75)
  rrect25% 0.25x0.6 smd mask+0: 9(-1.75,-2.4) 10(-1.25,-2.4) 11(-0.75,-2.4) 12(-0.25,-2.4) 13(0.25,-2.4) 14(0.75,-2.4) 15(1.25,-2.4) 16(1.75,-2.4) 25(1.75,2.4) 26(1.25,2.4) 27(0.75,2.4) 28(0.25,2.4) 29(-0.25,2.4) 30(-0.75,2.4) 31(-1.25,2.4) 32(-1.75,2.4)
  rect 3.45x3.45 smd paste-3 mask+0: 33(0,0)
  silkscreen extent -3.39,-2.95 2.95,2.95, body extent -2.56,-2.56 2.56,2.56, height 1.01
XTAL_314_240X47_SMD [mm] "CASE: TH"
  rect 6.096x1.2 smd: 1(0,0) 2(8,0)
  silkscreen extent -3.29,-2.44 11.32,2.57, body extent -2.99,-2.27 10.9,2.41, height 3.05

## Part data
C1 C6 C10 C19: library part CAP_10nF-50V-10%-0805, "10000pF ±10% 50V Ceramic Capacitor X7R 0805 (2012 Metric)", Alternate Part Number-1=GRM2195C1H103JA01D, Case/Package=0805, Manufacturer=Samsung, Manufacturer Part Number=C0805C103K5RECAUTO, Supplier Part Number-1=0805B103K500CT, Supplier-1=SIRICOM
C2 C11: library part CAP_20pF-50V-10%-0805, "±10% 50V Ceramic Capacitor C0G, NP0 0805 (2012 Metric)", Alternate Part Number-1=NA, Case/Package=0805, Manufacturer="AVX Corporation", Manufacturer Part Number=08055A200KAT2A, Supplier Part Number-1="478-11887-1-ND - Cut Tape (CT)", Supplier-1=Digikey
C3 C7 C49 C50 C59 C80 C83 C86 C89: library part CAP_10uF-50V-10%-1206, "10µF ±10% 50V Ceramic Capacitor X7R 1206 (3216 Metric)", Alternate Part Number-1=GRT31CR61H106ME01L, Case/Package=1206, Manufacturer=KEMET, Manufacturer Part Number=CL31B106KBHNNNE, Supplier Part Number-1=CC1206KKX5R9BB106, Supplier-1=SIRICOM
C4 C8 C18 C32 C33 C38 C41 C42 C43 C51 C53 C54 C57 C64 C71 C74 C75 C76 C82 C85 C88 C91: library part CAP_1uF-50V-5%-0805, "1µF ±5% 50V Ceramic Capacitor X7R 0805 (2012 Metric)", Alternate Part Number-1=0805F105M500NT, Case/Package=0805, Manufacturer=Samsung, Manufacturer Part Number=CC0805JKX7R9BB105, Supplier Part Number-1=CL21B105KBFNNNE, Supplier-1=SIRICOM
C5 C9 C20 C21 C22 C25 C26 C27 C28 C34 C35 C36 C44 C48: library part CAP_0.1uF-50V-5%-0805, "0.1µF ±5% 50V Ceramic Capacitor X7R 0805 (2012 Metric)", Alternate Part Number-1=0805B104M500, Case/Package=0805, Manufacturer="AVX Corporation", Manufacturer Part Number=08055C104JAT4A, Supplier Part Number-1=0805B104J500CT, Supplier-1=SIRICOM
C12: library part CAP_10nF-1KV-10%-RAD-TH, "10000pF ±10% 1000V (1kV) Ceramic Capacitor X7R Radial", Alternate Part Number-1=NA, Case/Package=TH, Manufacturer=Yageo, Manufacturer Part Number=RDER73A103K2K1H03B, Supplier Part Number-1=RDER73A103K2K1H03B, Supplier-1="SP ROAD"